# EAGLE board Lynx-32 (EAGLE 9.6.2)
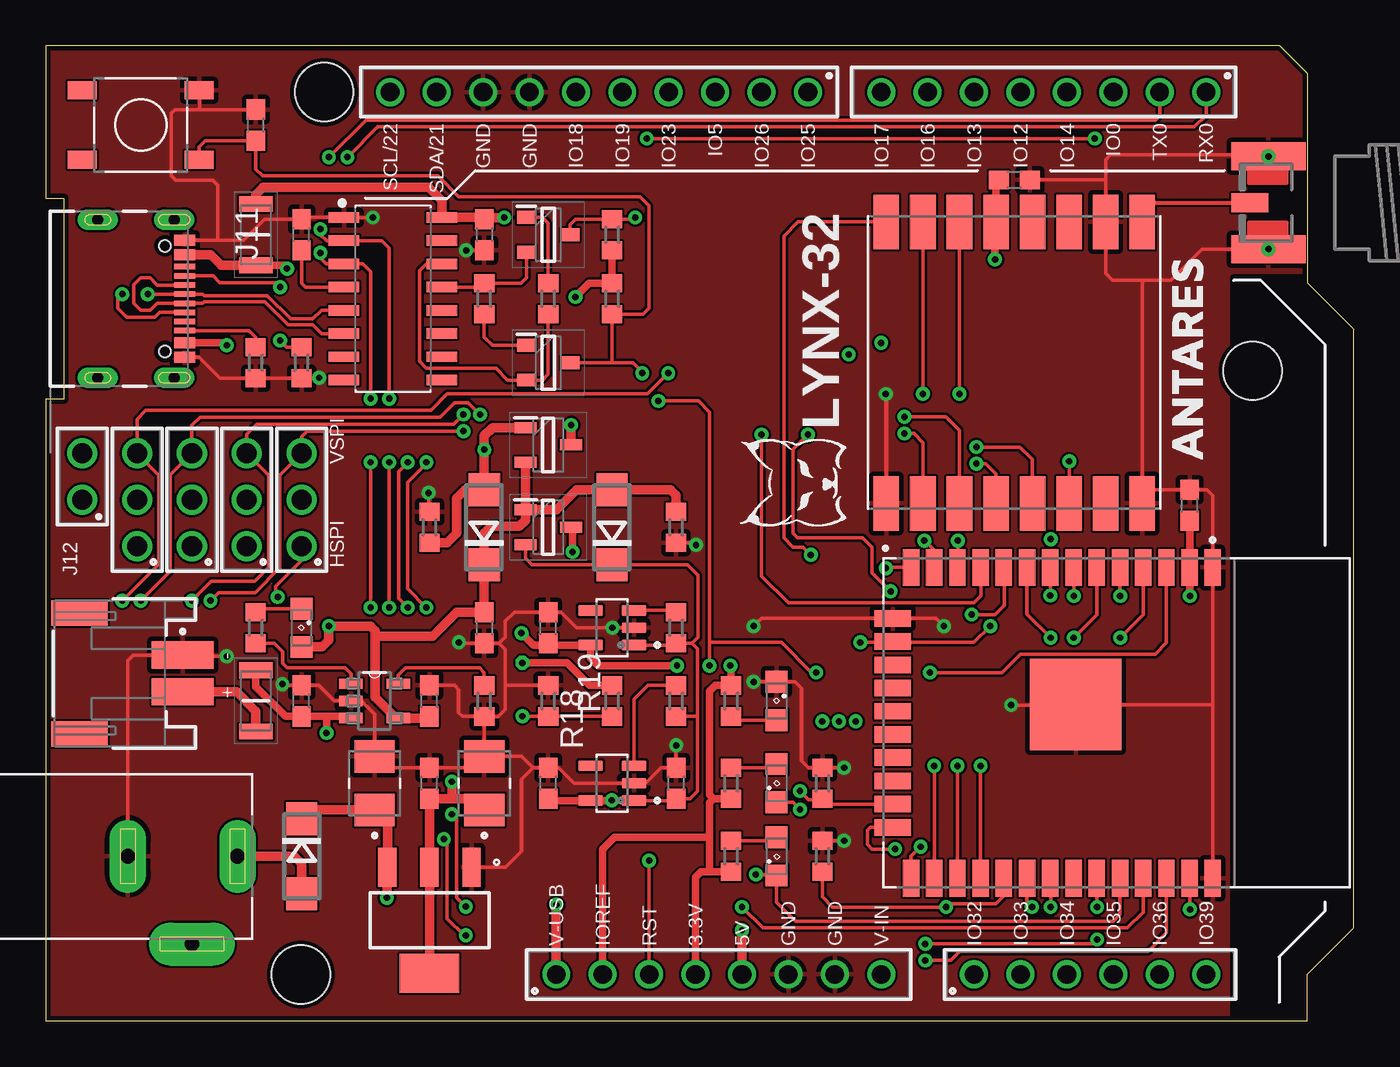
[diagram p0: board, top side]
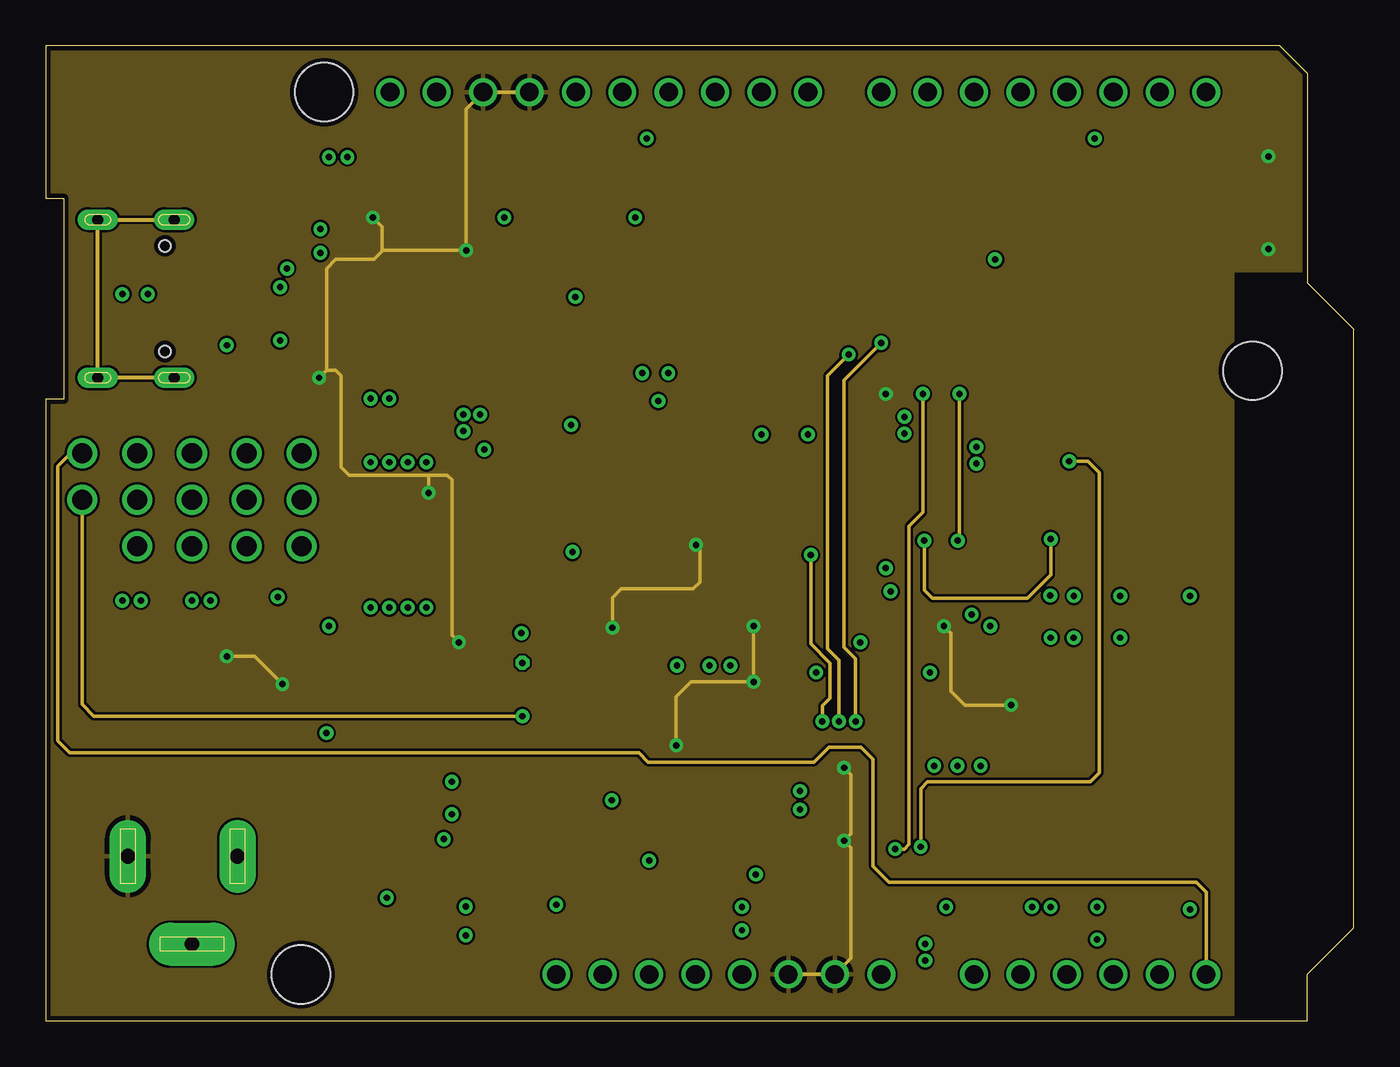
[diagram p1: board, inner layer Route2]
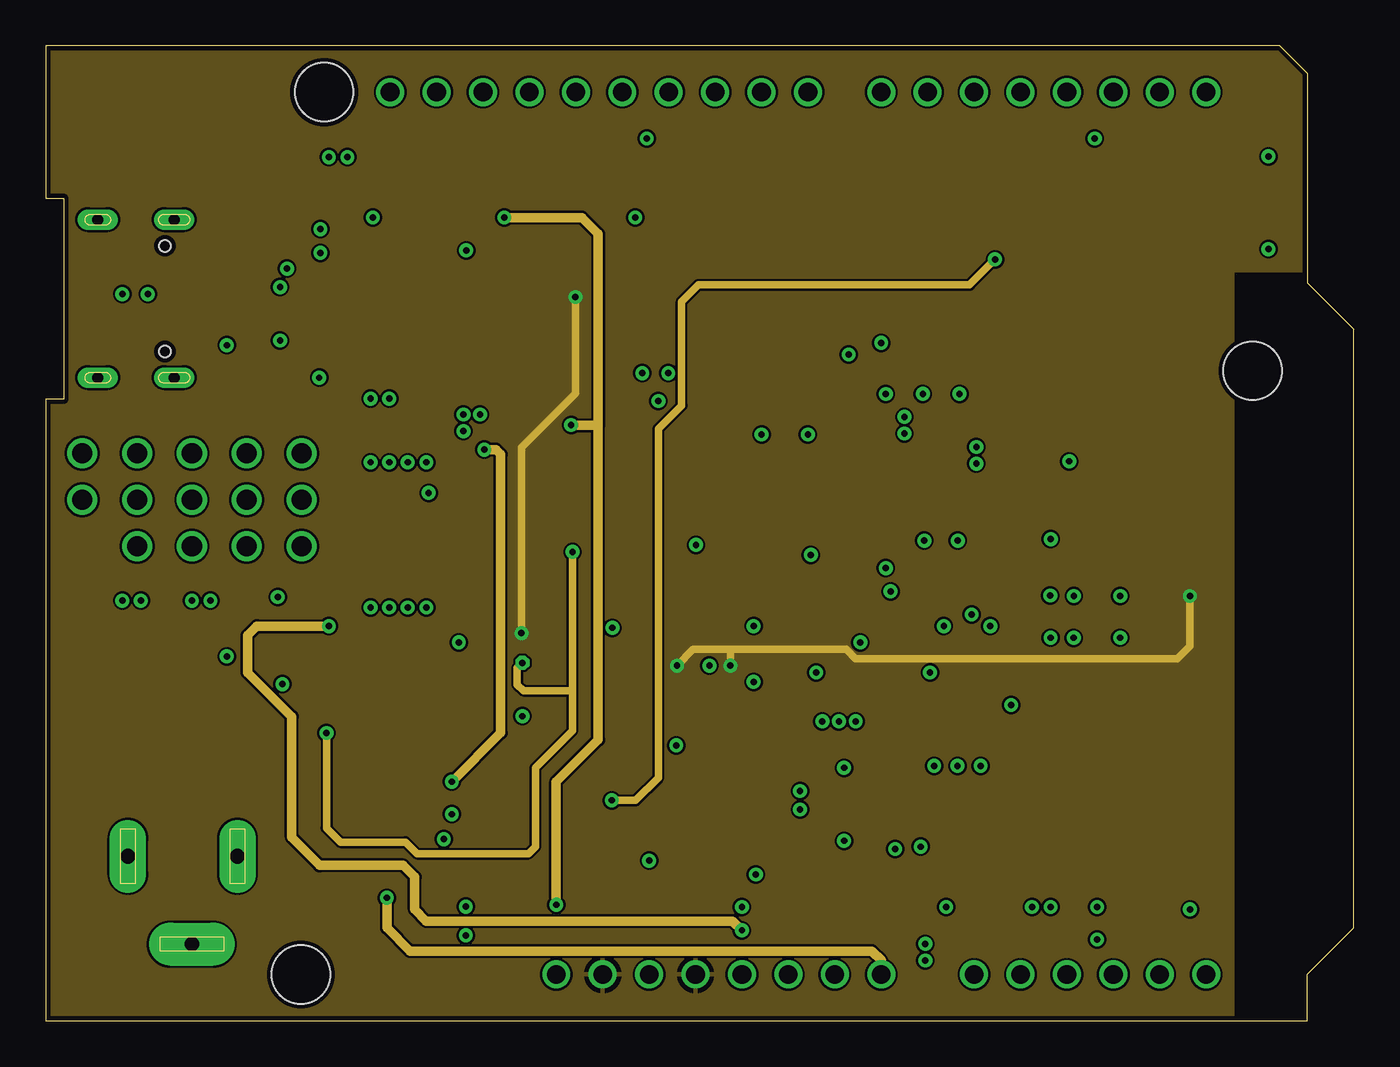
[diagram p2: board, inner layer Route15]
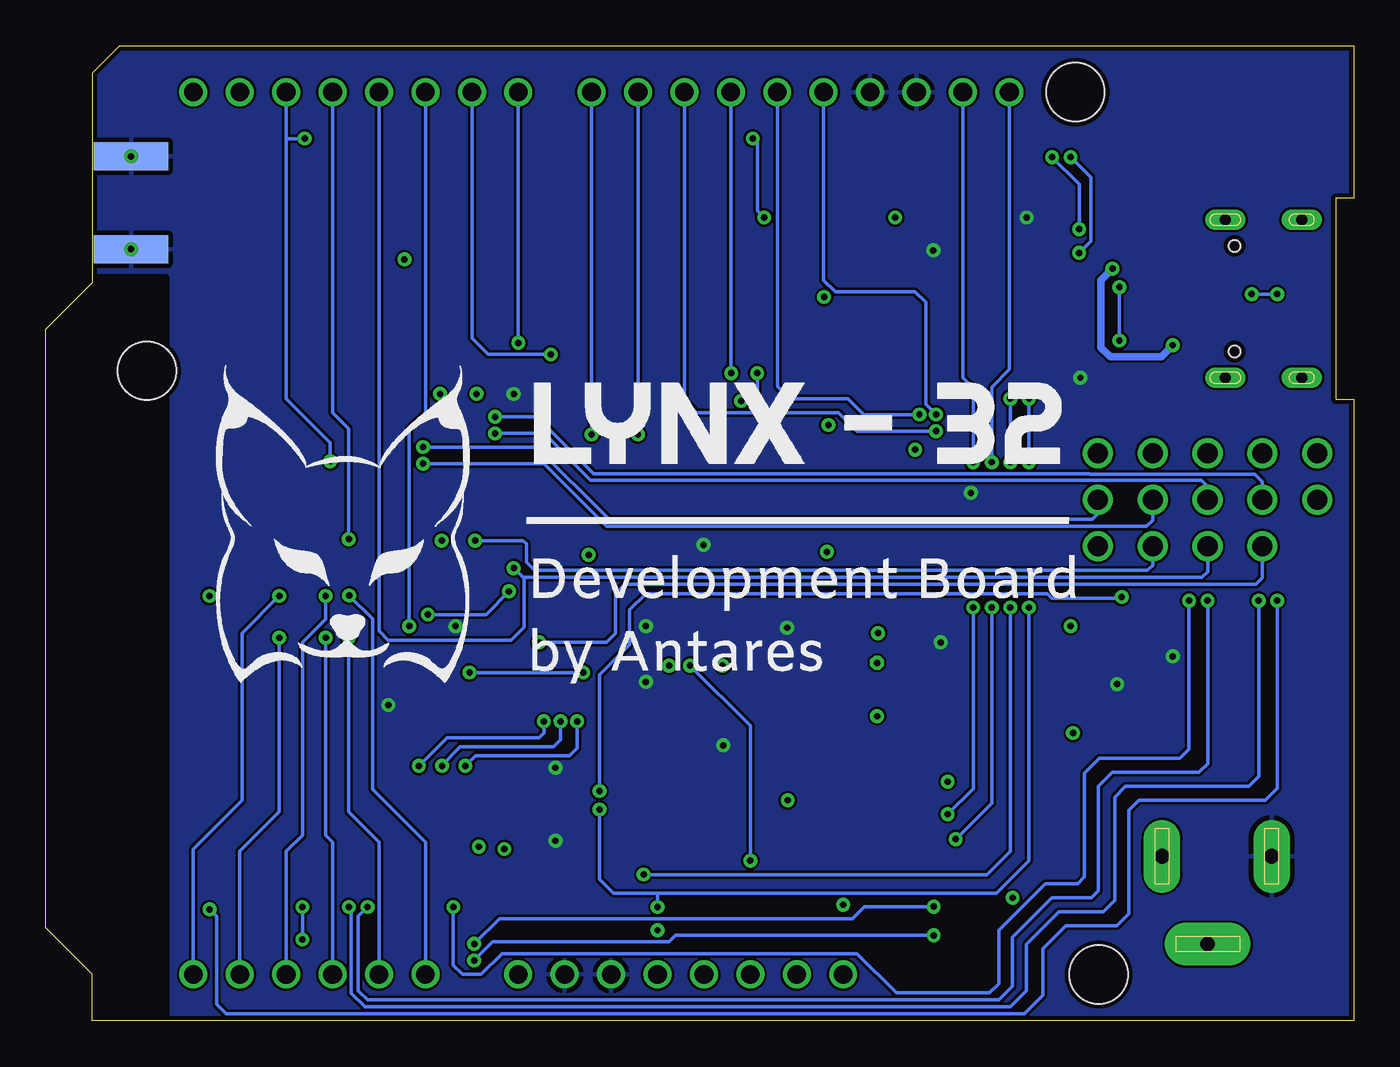
[diagram p3: board, bottom side, seen from below]

Size 71.58 x 53.34 mm. Coordinates in mm from the lower left corner, seen from the top.
Outline: 0,0 69.04,0 69.04,2.54 71.58,5.08 71.58,37.84 69.04,40.38 69.04,51.82 67.52,53.34 0,53.34 0,45 1,45 1,34 0,34 0,0
Copper layers (1+2*15+16): Top 0.035mm / dielectric 0.2mm / Route2 0.0175mm / dielectric 0.665mm / Route15 0.0175mm / dielectric 0.2mm / Bottom 0.035mm
Design rules "default *": minimum track width 5mil, minimum drill 0.25mm, track to track 5mil, track to pad 6mil, pad to pad 6mil, via to via 6mil, smd to smd 6mil, copper to edge 10mil, drill to drill 6mil, minimum pad ring 10mil, minimum via ring 8mil, stop-mask expansion 4mil, vias tented up to drill 25mil, thermal gap 10mil
Holes 3.2 mm at 13.97,2.54 15.24,50.8 66.04,35.56
tRestrict: 5 lines
bRestrict: 4 lines
vRestrict: 3 lines

## Footprints (pad centres in the part's own frame; a part is rotated, then mirrored left to right if it is on the bottom)
C0603 = smd 1.1 x 1: 1 -0.85,0; 2 0.85,0
CAPPM3528X210N = smd 1.79 x 2.21: 1 -1.46,0; 2 1.46,0
DO214AC = smd 1.8 x 1.7: A 2.05,0; C -2.05,0
FUSC3216X100N = smd 0.86 x 1.82: 1 -1.675,0; 2 1.675,0
61300611821 = drill 1.02: 1 -6.35,0; 2 -3.81,0; 3 -1.27,0; 4 1.27,0; 5 3.81,0; 6 6.35,0
61300811821 = drill 1.02: 1 -8.89,0; 2 -6.35,0; 3 -3.81,0; 4 -1.27,0; 5 1.27,0; 6 3.81,0; 7 6.35,0; 8 8.89,0
61301011821 = drill 1.02: 1 -11.43,0; 2 -8.89,0; 3 -6.35,0; 4 -3.81,0; 5 -1.27,0; 6 1.27,0; 7 3.81,0; 8 6.35,0; 9 8.89,0; 10 11.43,0
NINIGI_DC-005 = drill 0.8 pad 2.35 long: 2 0,-4.8 | drill 0.8 pad 2 long: 3 -3.5,0; 4 2.5,0
61300311121 = drill 1.1: 1 -2.54,0; 2 0,0; 3 2.54,0
620102131822 = smd 1.5 x 3.4: 1 -1,2.9; 2 1,2.9 | smd 1.4 x 3.1: Z1 -3.3,-2.75; Z2 3.3,-2.75
GCT_USB4105-GF-A = smd 0.6 x 1.15: A1_B12 -3.2,4.755; A4_B9 -2.4,4.755; B1_A12 3.2,4.755; B4_A9 2.4,4.755 | smd 0.3 x 1.15: A5 -1.25,4.755; A6 -0.25,4.755; A7 0.25,4.755; A8 1.25,4.755; B5 1.75,4.755; B6 0.75,4.755; B7 -0.75,4.755; B8 -1.75,4.755 | drill 0.6 pad 1.05 long: S1 -4.32,4.18; S4 4.32,4.18 | drill 0.6 pad 1 long: S2 -4.32,0; S3 4.32,0 | hole 0.65: 2.89,3.68; -2.89,3.68
61300211121 = drill 1.1: 1 -1.27,0; 2 1.27,0
SML0805 = smd 1.2 x 1.2: A 1.05,0; C -1.05,0
SOT95P280X125-3N = smd 1.2 x 0.6: 1 -1.25,0.95; 2 -1.25,-0.95; 3 1.25,0
SOT95P240X120-3N = smd 1 x 0.7: 1 -1.2,0.95; 2 -1.2,-0.95; 3 1.2,0
R0603 = smd 1 x 1.1: 1 -0.85,0; 2 0.85,0
SW_PTS525SM15SMTR2LFS = smd 1.6 x 1: 1 -3.2,1.9; 2 3.2,1.9; 3 -3.2,-1.9; 4 3.2,-1.9
MODULE_ESP32-WROOM-32(8MB) = smd 2 x 0.9: 1 -8.5,5.26; 2 -8.5,3.99; 3 -8.5,2.72; 4 -8.5,1.45; 5 -8.5,0.18; 6 -8.5,-1.09; 7 -8.5,-2.36; 8 -8.5,-3.63; 9 -8.5,-4.9; 10 -8.5,-6.17; 11 -8.5,-7.44; 12 -8.5,-8.71; 13 -8.5,-9.98; 14 -8.5,-11.25; 25 8.5,-11.25; 26 8.5,-9.98; 27 8.5,-8.71; 28 8.5,-7.44; 29 8.5,-6.17; 30 8.5,-4.9; 31 8.5,-3.63; 32 8.5,-2.36; 33 8.5,-1.09; 34 8.5,0.18; 35 8.5,1.45; 36 8.5,2.72; 37 8.5,3.99; 38 8.5,5.26 | smd 0.9 x 2: 15 -5.715,-12.25; 16 -4.445,-12.25; 17 -3.175,-12.25; 18 -1.905,-12.25; 19 -0.635,-12.25; 20 0.635,-12.25; 21 1.905,-12.25; 22 3.175,-12.25; 23 4.445,-12.25; 24 5.715,-12.25 | smd 5 x 5: 39 -1,-2.24
XCVR_RFM95W-915S2 = smd 3 x 1.4: 1 -7.7,7; 2 -7.7,5; 3 -7.7,3; 4 -7.7,1; 5 -7.7,-1; 6 -7.7,-3; 7 -7.7,-5; 8 -7.7,-7; 9 7.7,-7; 10 7.7,-5; 11 7.7,-3; 12 7.7,-1; 13 7.7,1; 14 7.7,3; 15 7.7,5; 16 7.7,7
SOT95P285X140-5N = smd 1.35 x 0.6: 1 -1.185,0.95; 2 -1.185,0; 3 -1.185,-0.95; 4 1.185,-0.95; 5 1.185,0.95
SOT230P700X180-4N = smd 2.15 x 1: 1 -2.9,2.3; 2 -2.9,0; 3 -2.9,-2.3 | smd 2.15 x 3.25: 4 2.9,0
SMA = smd 1.524 x 4.064: GND@1 2.54,2.032; GND@2 -2.54,2.032 | smd 1.524 x 4.064 bottom: GND@3 -2.54,2.032; GND@4 2.54,2.032 | smd 1.016 x 2.032: P 0,3.048
SOIC127P600X175-16N = smd 1.655 x 0.568: 1 -2.678,4.445; 2 -2.678,3.175; 3 -2.678,1.905; 4 -2.678,0.635; 5 -2.678,-0.635; 6 -2.678,-1.905; 7 -2.678,-3.175; 8 -2.678,-4.445; 9 2.678,-4.445; 10 2.678,-3.175; 11 2.678,-1.905; 12 2.678,-0.635; 13 2.678,0.635; 14 2.678,1.905; 15 2.678,3.175; 16 2.678,4.445
SOT95P280X145-5N = smd 1.27 x 0.559: 1 -1.295,0.94; 2 -1.295,0; 3 -1.295,-0.94; 4 1.295,-0.94; 5 1.295,0.94

## Placement (x,y rotation side)
C1  100nF  [C0603]  24,43 270 top
C2  100nF  [C0603]  14,43 90 top
C3  100nF  [C0603]  24,21.5 270 top
C4  100nF  [C0603]  27.5,21.5 90 top
C5  100nF  [C0603]  34.5,13 90 top
C6  100nF  [C0603]  27.5,13 90 top
C7  T543B106M025ATS100  [CAPPM3528X210N]  18,13 90 top
C8  T543B106M025ATS100  [CAPPM3528X210N]  24,13 90 top
C9  100nF  [C0603]  21,13 90 top
C10  100nF  [C0603]  14,17.5 90 top
C11  100nF  [C0603]  21,17.5 90 top
C12  100nF  [C0603]  11.5,49 90 top
C14  100nF  [C0603]  62.6,28.2 90 top
C15  100nF  [C0603]  53,46 0 top
D1  [DO214AC]  24,27 90 top
D2  [DO214AC]  31,27 90 top
D3  [DO214AC]  14,9 270 top
F1  MF-NSML260_12-2  [FUSC3216X100N]  11.5,43 270 top
F2  MF-NSML260_12-2  [FUSC3216X100N]  11.5,17.5 270 top
J1  [61300611821]  57.15,2.54 0 top
J2  [61300811821]  36.83,2.54 0 top
J3  [61300811821]  54.61,50.8 180 top
J4  [61301011821]  30.28,50.8 180 top
J5  DC-005  [NINIGI_DC-005]  8,9 0 top
J6  [61300311121]  5,28.5 90 top
J7  [61300311121]  8,28.5 90 top
J8  [61300311121]  11,28.5 90 top
J9  [61300311121]  14,28.5 90 top
J10  620102131822  [620102131822]  4.6,19 270 top
J11  USB4105-GF-A  [GCT_USB4105-GF-A]  2.85,39.5 270 top
J12  [61300211121]  2,29.77 90 top
LED1  [SML0805]  40,13 90 top
LED2  [SML0805]  40,9 90 top
LED3  [SML0805]  40,17.5 270 top
LED4  [SML0805]  14,21.5 270 top
Q1  AO3401A  [SOT95P280X125-3N]  27.5,31.5 0 top
Q2  AO3401A  [SOT95P280X125-3N]  27.5,27 0 top
Q3  MMBT3904  [SOT95P240X120-3N]  27.5,36 0 top
Q4  MMBT3904  [SOT95P240X120-3N]  27.5,43 0 top
R1  5.1K  [R0603]  14,36 90 top
R2  5.1K  [R0603]  11.5,36 90 top
R3  2K  [R0603]  37.5,13 270 top
R4  2K  [R0603]  37.5,9 270 top
R5  1K  [R0603]  24,39.5 270 top
R6  10K  [R0603]  31,39.5 90 top
R7  1K  [R0603]  27.5,39.5 270 top
R8  10K  [R0603]  31,43 90 top
R9  100K  [R0603]  21,27 270 top
R10  100K  [R0603]  34.5,27 90 top
R11  10K  [R0603]  34.5,21.5 90 top
R12  10K  [R0603]  34.5,17.5 90 top
R13  10K  [R0603]  24,17.5 90 top
R14  2K  [R0603]  37.5,17.5 90 top
R15  10K  [R0603]  42.5,13 270 top
R16  470R  [R0603]  11.5,21.5 90 top
R17  10K  [R0603]  42.5,9 270 top
R18  5.1K  [R0603]  27.5,17.5 270 top
R19  5.1K  [R0603]  31,17.5 90 top
S1  PTS525SM15SMTR2LFS  [SW_PTS525SM15SMTR2LFS]  5.2,49 0 top
U1  ESP32-WROOM-32(8MB)  [MODULE_ESP32-WROOM-32(8MB)]  58.6,16.3 270 top
U2  RFM95W-915S2  [XCVR_RFM95W-915S2]  53,36 90 top
U3  AP2112K-3.3TRG1  [SOT95P285X140-5N]  31,21.5 180 top
U4  AP2112K-3.3TRG1  [SOT95P285X140-5N]  31,13 180 top
U5  LD1117S50TR  [SOT230P700X180-4N]  21,5.5 270 top
U$1  SMA  [SMA]  68.94,44.75 90 top
U$2  CH340G-3D  [SOIC127P600X175-16N]  19,39.5 0 top
U$3  MCP73831T-5ACI/OT  [SOT95P280X145-5N]  18,17.5 0 top

## Library data of the parts
C1-C6 C9-C12 C14 C15 = rcl; SPICEPREFIX: C
C7 C8 = T543B106M025ATS100; AVAILABILITY: Not in stock; DESCRIPTION: CAP TANT POLY 10UF 25V 3528; MF: KEMET; MP: T543B106M025ATS100; PACKAGE: 1411 KEMET; PRICE: None
D1-D3 = diode
F1 F2 = MF-NSML260_12-2; ARROW_PART_NUMBER: MF-NSML260/12-2; ARROW_PRICE-STOCK: https://www.arrow.com/en/products/mf-nsml26012-2/bourns; DESCRIPTION: Resettable Fuses - PPTC 2.6A 12V 1206 LOW-OHMIC; HEIGHT: 1mm; MANUFACTURER_NAME: Bourns; MANUFACTURER_PART_NUMBER: MF-NSML260/12-2; MOUSER_PART_NUMBER: 652-MF-NSML260/12-2; MOUSER_PRICE-STOCK: https://www.mouser.com/Search/Refine.aspx?Keyword=652-MF-NSML260%2F12-2
J1 = Wurth_Connectors_WR-PHD; DATASHEET-URL: https://katalog.we-online.com/em/datasheet/61300611821.pdf; GENDER: Socket Header; IR: 3A; MATES: WR-PHD 2.54mm SMT Pin Header/THT Angled Pin Header/THT Pin Header; PACKAGING: Tray; PART-NUMBER: 61300611821; PINS: 6; ROWS: Single; TYPE: Straight
J2 J3 = Wurth_Connectors_WR-PHD; DATASHEET-URL: https://katalog.we-online.com/em/datasheet/61300811821.pdf; GENDER: Socket Header; IR: 3A; MATES: WR-PHD 2.54mm SMT Pin Header/THT Angled Pin Header/THT Pin Header; PACKAGING: Tray; PART-NUMBER: 61300811821; PINS: 8; ROWS: Single; TYPE: Straight
J4 = Wurth_Connectors_WR-PHD; DATASHEET-URL: https://katalog.we-online.com/em/datasheet/61301011821.pdf; GENDER: Socket Header; IR: 3A; MATES: WR-PHD 2.54mm SMT Pin Header/THT Angled Pin Header/THT Pin Header; PACKAGING: Tray; PART-NUMBER: 61301011821; PINS: 10; ROWS: Single; TYPE: Straight
J5 = DC-005; AVAILABILITY: No availability data; DESCRIPTION: 6.4x14.2x9.0mm Power DC Receptacle; MF: Best Inc.; MP: DC-005; PACKAGE: DC Power Jack Best Inc.; PRICE: None
J6-J9 = Wurth_Connectors_WR-PHD; DATASHEET-URL: https://katalog.we-online.com/em/datasheet/61300311121.pdf; GENDER: Pin Header; IR: 3A; MATES: WR-PHD 2.54mm Angled Socket Header /SMT Socket Header/Socket Header; PACKAGING: Bag; PART-NUMBER: 61300311121; PINS: 3; ROWS: Single; TYPE: Straight
J10 = Wurth_Connectors_WR-WTB; CONTACT-RESISTANCE: 20mOhm; DATASHEET-URL: https://www.we-online.com/catalog/datasheet/620102131822.pdf; GENDER: Male; IR: 2A; L: 8mm; MOUNT: SMT; PACKAGING: Tape and Reel; PART-NUMBER: 620102131822; PCB-CABLE-PANEL: PCB; PINS: 2; PITCH: 2mm; TOL-R: max.; TYPE: Horizontal; USE-WITH: WR-WTB 2.00 mm Female Terminal Housing; WORKING-VOLTAGE: 100V(AC)
J11 = USB4105-GF-A; AVAILABILITY: Warning; DESCRIPTION: USB-C (USB TYPE-C) USB 2.0 Receptacle Connector 24 (16+8 Dummy) Position Surface Mount, Right Angle; Through Hole; MF: GCT; MP: USB4105-GF-A; PACKAGE: None; PRICE: None
J12 = Wurth_Connectors_WR-PHD; DATASHEET-URL: https://katalog.we-online.com/em/datasheet/61300211121.pdf; GENDER: Pin Header; IR: 3A; MATES: WR-PHD 2.54mm Angled Socket Header /SMT Socket Header/Socket Header; PACKAGING: Bag; PART-NUMBER: 61300211121; PINS: 2; ROWS: Single; TYPE: Straight
LED1-LED4 = led
Q1 Q2 = AO3401A; ARROW_PART_NUMBER: AO3401A; ARROW_PRICE-STOCK: https://www.arrow.com/en/products/ao3401a/alpha-and-omega-semiconductor; DESCRIPTION: 30V P-Channel MOSFET; HEIGHT: 1.25mm; MANUFACTURER_NAME: Alpha & Omega Semiconductors; MANUFACTURER_PART_NUMBER: AO3401A
Q3 Q4 = MMBT3904; ARROW_PART_NUMBER: MMBT3904; ARROW_PRICE-STOCK: https://www.arrow.com/en/products/mmbt3904/on-semiconductor; DESCRIPTION: Transistor GP BJT NPN 40V 0.2A SOT23 Fairchild MMBT3904 NPN Bipolar Transistor, 0.2 A, 40 V, 3-Pin SOT-23; HEIGHT: 1.2mm; MANUFACTURER_NAME: ON Semiconductor; MANUFACTURER_PART_NUMBER: MMBT3904; MOUSER_PART_NUMBER: 512-MMBT3904; MOUSER_PRICE-STOCK: https://www.mouser.co.uk/ProductDetail/ON-Semiconductor-Fairchild/MMBT3904?qs=UMEuL5FsraCg3xKjS4uBJQ%3D%3D
R1-R19 = rcl; SPICEPREFIX: R
S1 = PTS525SM15SMTR2LFS; AVAILABILITY: In Stock; DESCRIPTION: Tactile Switch SPST-NO Top Actuated Surface Mount; MF: C&K; MP: PTS525SM15SMTR2 LFS; PACKAGE: Tactile Switch CK; PRICE: None; PURCHASE-URL: https://pricing.snapeda.com/search/part/PTS525SM15SMTR2 LFS/?ref=eda
U1 = ESP32-WROOM-32_8MB_; AVAILABILITY: Unavailable; DESCRIPTION: Bluetooth, WiFi 802.11b/g/n, Bluetooth v4.2 +EDR, Class 1, 2 and 3 Transceiver Module 2.4GHz ~ 2.5GHz Surface Mount; MF: Espressif Systems; MP: ESP32-WROOM-32 (8MB); PACKAGE: Module Espressif Systems; PRICE: None
U2 = RFM95W-915S2; AVAILABILITY: Unavailable; DESCRIPTION: General ISM < 1GHz LoRa™ Transceiver Module 915MHz Surface Mount; MF: RF Solutions; MP: RFM95W-915S2; PACKAGE: SMD-16 RF Solutions; PRICE: None
U3 U4 = AP2112K-3.3TRG1; AVAILABILITY: Unavailable; DESCRIPTION: Linear Voltage Regulator IC 1 Output 600mA SOT-25; MF: Diodes Inc.; MP: AP2112K-3.3TRG1; PACKAGE: SOT-753 Diodes Inc.; PRICE: None
U5 = LD1117S50TR; AVAILABILITY: Good; DESCRIPTION: Linear Voltage Regulator IC 1 Output 800mA SOT-223; MF: STMicroelectronics; MP: LD1117S50TR; PACKAGE: SOT-223 STMicroelectronics; PRICE: None; PURCHASE-URL: https://pricing.snapeda.com/search/part/LD1117S50TR/?ref=eda
U$1 = SMA
U$2 = ch340g
U$3 = MCP73831T-5ACI_OT; AVAILABILITY: Good; DESCRIPTION: Charger IC Lithium Ion/Polymer SOT-23-5; MF: Microchip; MP: MCP73831T-5ACI/OT; PACKAGE: SOT-23-5 Microchip; PRICE: None; PURCHASE-URL: https://pricing.snapeda.com/search/part/MCP73831T-5ACI/OT/?ref=eda

## Nets
3.3V: C4.1 C14.1 J2.2 J2.4 R3.2 R4.2 R6.2 R8.1 R14.2 U1.2 U3.5
3.3V_RFM: C6.1 C15.1 U2.13 U4.5
5V: C3.1 C11.1 D1.C D2.A J2.5 LED4.A Q1.2 Q2.1 R10.2 U$3.4
5V_REG: C8.1 C9.1 D1.A Q1.1 R9.2 U5.2 U5.4
5V_USB: C1.1 F1.1 J2.1 Q1.3 U$2.16
ANT: U2.9 U$1.P
BATLV: J12.1 R18.2 R19.1
CP_RXD: J3.2 LED1.C U1.35 U$2.3
CP_TXD: J3.1 LED2.C U1.34 U$2.2
DTR: Q4.2 R5.1 U$2.13
EN: C12.1 J2.3 Q3.3 R6.1 S1.4 U1.3
GND: C1.2 C2.2 C3.2 C4.2 C5.2 C6.2 C7.2 C8.2 C9.2 C10.2 C11.2 C12.2 C14.2 C15.2 J2.6 J2.7 J4.7 J4.8 J5.3 J10.1 J11.A1_B12 J11.B1_A12 LED3.C R1.1 R2.1 R9.1 R10.1 R13.1 R15.1 R17.1 R18.1 S1.2 U1.1 U1.15 U1.38 U1.39 U2.1 U2.8 U2.10 U3.2 U4.2 U5.1 U$1.GND@1 U$1.GND@2 U$1.GND@3 U$1.GND@4 U$2.1 U$3.2
IO0: J3.3 Q4.3 R8.2 U1.25 U2.6
IO2: U1.24 U2.15
IO4: U1.26 U2.16
IO5: J4.3 J9.3 R17.2 U1.29
IO12: J3.5 J7.1 U1.14
IO13: J3.6 J6.1 U1.16
IO14: J3.4 J8.1 U1.13
IO15: J9.1 R15.2 U1.23
IO16: J3.7 U1.27
IO17: J3.8 U1.28
IO18: J4.6 J8.3 U1.30
IO19: J4.5 J7.3 U1.31
IO21: J4.9 U1.33
IO22: J4.10 U1.36
IO23: J4.4 J6.3 U1.37
IO25: J4.1 U1.10
IO26: J4.2 U1.11
IO27: U1.12 U2.14
IO32: J1.1 U1.8
IO33: J1.2 U1.9
IO34: J1.3 U1.6
IO35: J1.4 U1.7
IO36: J1.5 U1.4
IO39: J1.6 J12.2 U1.5
MISO: J7.2 U2.2
MOSI: J6.2 U2.3
N$1: F1.2 J11.A4_B9 J11.B4_A9
N$3: J11.B5 R2.2
N$5: LED3.A R14.1
N$7: F2.2 J10.2
N$9: J11.A5 R1.2
N$14: C5.1 D2.C Q2.2 R11.1 R12.1 U3.1 U4.1
N$15: C2.1 U$2.4
N$16: LED1.A R3.1
N$17: LED2.A R4.1
N$18: R11.2 U3.3
N$19: R12.2 U4.3
N$20: D3.A J5.4
N$21: R13.2 U$3.5
N$23: Q4.1 R7.1
N$24: Q3.1 R5.2
N$25: LED4.C R16.2
N$29: R16.1 U$3.1
NSS: J9.2 U2.5
RTS: Q3.2 R7.2 U$2.14
SCK: J8.2 U2.4
SHELL_GND: J11.S1 J11.S2 J11.S3 J11.S4
USB_N: J11.A7 J11.B7 U$2.6
USB_P: J11.A6 J11.B6 U$2.5
V-IN: C7.1 D3.C J2.8 U5.3
VBAT: C10.1 F2.1 Q2.3 R19.2 U$3.3

## Tracks (layer width: path | path; a pad name or v marks a point on that pad's centre or on a via)
3.3V  (via drill 0.35)
  Top 0.406: R3.2 36.53,12.15 | 36.53,12.15 36.32,11.94 36.32,10.03 | 27.6,20.55 U3.5 29.82,19.84 30.23,19.43 v34.54,19.43 | 27.6,20.55 C4.1 | 36.53,12.15 36.32,12.36 36.32,18.03 36.64,18.35 R14.2 37.5,19.4 v37.47,19.43 | R8.1 R6.2 29.74,40.35 v28.99,39.59 | C14.1 U1.2 | U1.2 | v62.61,23.24 62.6,23.25 U1.2 | v26.04,21.21 26.69,20.55 27.6,20.55 | J2.2 30.48,9.37 31.14,10.03 36.32,10.03 | 36.3,8.15 35.86,8.15 35.56,7.85 J2.4 | 36.3,8.15 R4.2 | 36.32,10.03 36.32,8.18 36.3,8.15
  Route15 0.406: v34.54,19.43 35.43,20.32 37.47,20.32 | v62.61,23.24 62.61,20.5 61.92,19.81 44.32,19.81 43.81,20.32 37.47,20.32 | v28.99,39.59 28.99,34.32 26.04,31.37 v26.04,21.21 | v37.47,19.43 37.47,20.32
  pour Route15: 0,0 65,0 65,10 65,41 69,41 69,54 67,54 0,54
3.3V_RFM  (via drill 0.35)
  Top 0.406: C6.1 27.6,12.05 U4.5 30.96,12.05 v30.98,12.06 | C15.1 52,45.85 U2.13 51.94,43.64 v51.94,41.66
  Route15 0.406: v30.98,12.06 32.28,12.06 33.53,13.31 33.53,32.38 34.8,33.66 34.8,39.34 35.71,40.26 50.55,40.26 v51.94,41.66
5V  (via drill 0.35)
  Top 0.508: Q1.2 Q2.1 | Q2.1 27.95,27.95 29.05,29.05 D2.A 34.2,29.05 34.5,28.75 R10.2 | Q2.1 26.25,27.39 25.91,27.05 24.38,27.05 24,26.67 D1.C C3.1 22.48,22.35 21.16,21.03 18.03,21.03 | C11.1 20.91,16.56 U$3.4 19.18,16.56 18.03,17.7 18.03,21.03 | J2.5 v38.1,4.95 | 18.03,21.03 18.03,21.33 17.78,21.59 v15.49,21.59 15.49,20.83 15.12,20.45 LED4.A
  Route15 0.508: v38.1,4.95 37.59,5.46 20.83,5.46 20.19,6.1 20.19,7.87 19.56,8.51 14.99,8.51 13.46,10.03 13.46,16.64 11.05,19.05 11.05,21.08 11.56,21.59 v15.49,21.59
5V_REG  (via drill 0.35)
  Top 0.508: U5.4 U5.2 C9.1 22.23,12.15 | 22.23,12.15 23.39,12.15 C8.1 | R9.2 21.96,26.15 22.48,26.67 22.48,28.57 22.95,29.05 D1.A v24,31.24 24,32 24.45,32.45 Q1.1 | 22.23,12.15 v22.23,13.08
  Route15 0.508: v22.23,13.08 24.89,15.75 24.89,30.98 24.64,31.24 v24,31.24
5V_USB  (via drill 0.35)
  Top 0.508: F1.1 11.5,45.18 11.91,45.59 20.95,45.59 21.68,44.87 U$2.16 23.91,43.95 23.91,43.94 | 23.91,43.94 C1.1 | Q1.3 v28.75,32.59 | v25.09,43.94 23.91,43.94 | J2.1 v27.94,6.35
  Route15 0.508: v25.09,43.94 29.34,43.94 30.23,43.05 30.23,32.59 | 30.23,32.59 30.23,15.37 27.94,13.08 v27.94,6.35 | 30.23,32.59 30.22,32.59 v28.75,32.59
ANT
  Top 0.213: U2.9 60,44.08 60.67,44.75 U$1.P
BATLV  (via drill 0.35)
  Top 0.203: R19.1 R18.2 v26.1,16.65 v26.09,16.66
  Route2 0.203: v26.09,16.66 2.64,16.66 2,17.3 J12.1
CP_RXD  (via drill 0.35)
  Top 0.203: v17.78,34.03 17.78,40.97 17.34,41.41 U$2.3 15.36,41.41 15.03,41.73 v15.03,42.01 | v17.78,30.55 v17.78,22.61 | v41.27,11.56 40.88,11.95 LED1.C | U1.35 60.05,5.95 59.18,5.08 39.24,5.08 v38.1,6.22 | J3.2 60.96,49.53 60.71,49.28 17.53,49.28 v15.49,47.24
  Bottom 0.203: v17.78,34.03 v17.78,30.55 | v41.27,11.56 41.27,7.75 40.51,6.99 38.1,6.99 | v17.78,22.61 17.78,8.76 19.56,6.99 38.1,6.99 | v38.1,6.22 38.1,6.99 | v15.49,47.24 14.4,46.15 14.4,42.65 v15.03,42.01
CP_TXD  (via drill 0.35)
  Top 0.203: v18.8,34.03 18.8,42.27 18.39,42.67 U$2.2 15.36,42.67 15.03,43.01 v15.03,43.31 | v18.8,30.55 v18.8,22.61 | v38.86,8 39.95,8 LED2.C 40,6.48 41.02,5.46 58.42,5.46 58.78,5.82 U1.34 | J3.1 63.5,49.53 62.87,48.9 18.16,48.9 v16.51,47.24
  Bottom 0.203: v18.8,34.03 v18.8,30.55 | v38.86,8 20.07,8 18.8,9.27 v18.8,22.61 | v15.03,43.31 15.03,45.77 v16.51,47.24
DTR
  Top 0.203: Q4.2 26.3,40.65 26,40.35 R5.1 23.79,40.13 U$2.13
EN  (via drill 0.35)
  Top 0.203: S1.4 8.4,47.82 8.73,48.15 C12.1 11.5,46.59 11.86,46.23 21.46,46.23 22.61,45.09 32.51,45.09 33.02,44.58 33.02,38.99 32.68,38.65 R6.1 31,36.01 31.01,36 | J2.3 v33.02,8.76 | v33.53,33.91 35.71,33.91 36.32,33.3 36.32,20.7 | 36.32,20.7 v36.32,19.43 | v32.64,35.43 32.64,35.51 32.15,36 31.01,36 | U1.3 61.32,20.68 60.71,20.07 53.34,20.07 52.32,19.05 v48.39,19.05 | v42.16,19.05 41.91,19.05 40.26,20.7 36.32,20.7 | Q3.3 31.01,36
  Bottom 0.203: v33.02,8.76 33.02,16.13 v36.32,19.43 | v33.53,33.91 33.07,33.91 32.64,34.34 v32.64,35.43 | v48.39,19.05 v42.16,19.05
GND  (via drill 0.35)
  Top 0.203: J11.B1_A12 8.4,36.3 9.55,35.15 R2.1 R1.1 14.94,35.15 v14.96,35.18 | J11.A1_B12 9.4,42.7 | 9.4,42.7 10.82,42.7 11.97,43.85 C2.2 14.1,43.95 U$2.1 v17.91,43.94 | C12.2 8.41,49.85 | J5.3 4.5,19.7 4.79,20 J10.1 7.56,19.94 v9.91,19.94 | v12.95,18.41 13.02,18.35 C10.2 14.92,18.35 15.77,17.5 U$3.2 17.27,17.5 18,16.77 C7.2 18.61,13.85 C9.2 23.39,13.85 C8.2 | 26.66,13.85 C6.2 28.06,13.85 28.91,13 U4.2 32.81,13 33.66,13.85 C5.2 v34.5,15.07 | C8.2 26.05,14.46 26.66,13.85 | U5.1 25.16,8.4 26.04,9.27 26.04,13.22 26.66,13.85 | R13.1 C8.2 | 9.4,42.7 9.4,45.72 9.14,45.97 7.11,45.97 6.86,46.23 6.86,49.63 7.08,49.85 8.41,49.85 | C1.2 v23.01,42.15 v23.01,42.14 | C11.2 22.37,18.35 22.61,18.11 22.61,16.87 22.82,16.65 R13.1 | v43.69,13.84 43.55,13.85 R15.1 41.74,13.85 41.36,14.23 41.36,18.21 41.01,18.55 LED3.C 38.74,18.55 v38.73,18.54 | R17.1 v43.69,9.85 | R9.1 20.95,27.89 v20.95,28.88 | 24.82,20.65 C3.2 22.66,20.65 v22.61,20.7 | R13.1 24.01,16.64 24.77,16.64 25.15,17.02 25.15,18.34 | 24.82,20.65 25.15,20.32 25.15,18.34 | 24.82,20.65 25.15,20.98 25.15,21.84 25.65,22.35 C4.2 28.2,22.35 29.05,21.5 v31.01,21.5 U3.2 | R10.1 35.47,26.15 v35.59,26.04 | U1.39 56.52,17.3 | 56.52,17.3 63.86,17.3 | 63.86,17.3 U1.38 | 63.86,17.3 U1.1 63.86,28.72 63.53,29.05 C14.2 60.5,29.05 60,28.55 U2.8 60,40.46 59.94,40.51 | v38.73,21.59 39.16,22.02 U1.15 48.72,22.02 v49.15,21.59 | 58,45.97 U2.10 58,40.88 58.37,40.51 59.94,40.51 | 59.94,40.51 61.57,40.51 63.27,42.21 U$1.GND@2 | U$1.GND@4 66.83,47.37 58.27,47.37 58,47.1 58,45.97 | v52.83,17.27 56.49,17.27 56.52,17.3 | S1.2 8.41,50.88 8.41,49.85 | 58,45.97 57.97,46 C15.2
  Top 0.203: R18.1 25.16,18.35 25.15,18.34
  Top 0.213: U2.1 46,34.26 v45.97,34.29
  Route2 0.203: v12.95,18.41 11.43,19.94 v9.91,19.94 | v14.96,35.18 15.37,35.58 | 18.41,42.09 18.41,43.43 v17.91,43.94 | 15.37,35.58 15.37,41.15 15.88,41.66 17.98,41.66 18.41,42.09 | 20.95,29.84 16.61,29.84 16.18,30.28 16.18,35.28 15.88,35.58 15.37,35.58 | J2.6 J2.7 44.07,3.43 44.07,9.47 v43.69,9.85 44.07,10.23 44.07,13.46 v43.69,13.84 | J4.7 J4.8 23.01,49.88 v23.01,42.14 18.47,42.14 18.41,42.09 | v22.61,20.7 22.23,21.08 22.23,29.59 21.97,29.84 20.95,29.84 | v35.59,26.04 35.81,25.81 35.81,24 35.43,23.62 31.5,23.62 31.01,23.14 v31.01,21.5 | v34.5,15.07 34.5,17.74 35.31,18.54 v38.73,18.54 v38.73,21.59 | v49.15,21.59 49.53,21.21 49.53,18.03 50.29,17.27 v52.83,17.27 | v20.95,28.88 20.95,29.84
  other vias: 66.91,42.21 66.91,47.29
  pour Top: 0,0 72,0 72,46 72,54 37,54 0,54
  pour Bottom: 0,0 72,0 72,54 0,54
  pour Route2: 0,0 65,0 65,41 69,41 69,54 68,54 0,54
IO0  (via drill 0.35)
  Top 0.203: Q4.3 28.7,43.56 28.99,43.85 R8.2 32.17,43.85 v32.26,43.94 | v56.01,30.61 U2.6 | v57.4,48.26 57.03,48.26 v32.9,48.26 v32.89,48.26 | U1.25 47.35,9 v47.88,9.53
  Route2 0.203: v47.88,9.53 47.88,12.7 48.26,13.08 57.17,13.08 57.66,13.56 57.66,29.97 57.02,30.61 v56.01,30.61
  Bottom 0.203: J3.3 58.42,48.26 | 58.42,48.26 58.42,34.04 56.01,31.62 v56.01,30.61 | v32.26,43.94 32.64,44.32 32.64,48.01 v32.89,48.26 | v57.4,48.26 v57.41,48.26 58.42,48.26
IO2  (via drill 0.35)
  Top 0.203: U2.15 v48,34.3 | v46.48,9.4 45.21,9.4 44.96,9.65 44.96,10.41 45.13,10.59 U1.24
  Route2 0.203: v48,34.3 48,27.81 47.24,27.05 47.24,9.65 46.99,9.4 v46.48,9.4
IO4  (via drill 0.35)
  Top 0.203: U1.26 v48.62,13.95 | v41.87,25.49 41.45,25.91 40.89,25.91 40.39,26.42 40.39,42.93 41.16,43.7 U2.16
  Route2 0.203: v42.5,16.38 42.5,17.22 42.93,17.65 42.93,19.56 41.87,20.61 v41.87,25.49
  Bottom 0.203: v48.62,13.95 48.07,14.5 42.91,14.5 42.5,14.91 v42.5,16.38
IO5  (via drill 0.35)
  Top 0.203: v22.86,32.26 14.31,32.26 14,31.95 J9.3 12.81,29.85 12.81,24.78 11.45,23.42 9.45,23.42 v9.02,22.99 | R17.2 42.5,6.78 43.05,6.22 v49.28,6.22 49.47,6.41 52.01,6.41 52.43,6.84 U1.29
  Bottom 0.203: v22.86,32.26 27.18,32.26 28.19,33.27 35.97,33.27 36.63,33.94 J4.3 | v9.02,22.99 9.02,14.86 9.53,14.35 13.92,14.35 14.73,13.54 14.73,7.87 15.11,7.49 16.89,7.49 19.43,4.95 19.43,2.03 19.94,1.52 25.02,1.52 27.18,3.68 46.61,3.68 47.75,2.54 48.77,2.54 49.28,3.05 v49.28,6.22
IO12  (via drill 0.35)
  Top 0.203: v45.97,24.77 46.01,24.8 U1.14
  Bottom 0.203: J7.1 8,24.56 8.3,24.26 45.34,24.26 | v45.97,24.77 45.47,24.26 45.34,24.26 | 45.34,24.26 45.4,24.19 45.4,21.53 46.1,20.83 52.83,20.83 53.34,21.34 J3.5
IO13  (via drill 0.35)
  Top 0.203: v44.58,20.7 46.31,20.7 | 46.31,20.7 U1.16 | v51.69,21.59 50.8,20.7 46.31,20.7
  Bottom 0.203: J6.1 5,24.23 5.36,23.88 39.88,23.88 40.39,23.37 40.39,21.21 40.89,20.7 v44.58,20.7 | J3.6 50.8,33.27 51.69,32.38 v51.69,21.59
IO14  (via drill 0.35)
  Top 0.203: U1.13 48.62,25.73 v48.08,26.27
  Route2 0.203: v48.08,26.27 48.08,23.55 48.51,23.11 53.72,23.11 55,24.39 v55,26.35
  Bottom 0.203: J8.1 11,24.93 11.29,24.64 44.83,24.64 45.28,25.08 45.28,26.1 45.45,26.27 v48.08,26.27 | J3.4 55.88,33.27 55,32.39 v55,26.35
IO15  (via drill 0.35)
  Top 0.203: J9.1 14,25.19 12.57,23.76 12.57,23.31 v12.7,23.18 | R15.2 42.55,12.11 | 42.55,12.11 42.8,11.86 U1.23 | v41.27,12.57 41.74,12.11 42.55,12.11
  Bottom 0.203: v41.27,12.57 41.27,18.92 39.62,20.57 39.62,22.48 38.73,23.37 16.76,23.37 16.51,23.11 12.77,23.11 v12.7,23.18
IO16  (via drill 0.35)
  Top 0.203: U1.27 v49.89,13.95
  Route2 0.203: v43.41,16.38 43.41,19.71 42.78,20.34 42.78,35.29 v43.94,36.45
  Bottom 0.203: J3.7 48.26,37.34 47.37,36.45 v43.94,36.45 | v49.89,13.95 49.89,13.99 48.9,14.99 43.79,14.99 43.41,15.37 v43.41,16.38
IO17  (via drill 0.35)
  Top 0.203: U1.28 v51.16,13.95
  Route2 0.203: v44.32,16.38 44.32,19.81 43.69,20.45 43.69,35.05 v45.72,37.08
  Bottom 0.203: J3.8 v45.72,37.08 | v51.16,13.95 49.62,15.49 44.58,15.49 44.32,15.75 v44.32,16.38
IO18  (via drill 0.35)
  Top 0.203: v22.86,33.17 22.33,32.64 11.54,32.64 11,32.09 J8.3 12.2,29.84 12.2,24.82 11.44,24.05 9.06,24.05 v8,22.99 | v53.97,6.22 53.7,6.5 U1.30
  Bottom 0.203: v22.86,33.17 23.42,33.73 23.42,39.3 24,39.88 28.38,39.88 29.01,40.51 J4.6 | v8,22.99 8,14.07 8.48,13.59 13.21,13.59 13.97,12.83 13.97,7.11 14.35,6.73 16.51,6.73 18.67,4.57 18.67,1.91 19.43,1.14 53.98,1.14 54.48,1.65 54.48,5.71 v53.97,6.22
IO19  (via drill 0.35)
  Top 0.203: v23.77,33.17 23.75,33.17 23.12,33.8 22.37,33.8 21.59,33.02 8.45,33.02 8,32.57 J7.3 6.82,29.86 6.82,24.6 v5.21,22.99 | v54.99,6.22 54.99,7.78 U1.31
  Bottom 0.203: v23.77,33.17 26.82,33.17 27.69,34.04 30.86,34.04 31.55,34.73 J4.5 | v5.21,22.99 5.21,13.37 5.75,12.83 12.5,12.83 13.08,12.24 13.08,6.6 13.72,5.97 16.13,5.97 17.91,4.19 17.91,1.65 18.8,0.76 54.1,0.76 54.86,1.52 54.86,6.09 v54.99,6.22
IO21  (via drill 0.35)
  Top 0.203: v20.83,30.55 20.83,30.48 20.13,29.78 19.81,29.46 19.81,23.62 v20.83,22.61 | v22.23,11.3 22.48,11.05 22.48,6.73 22.96,6.25 v22.99,6.25 | v48.13,4.21 57.29,4.21 v57.53,4.45 | v57.53,6.22 57.53,7.78 U1.33
  Bottom 0.203: J4.9 21.39,35.18 20.83,34.62 v20.83,30.55 | v20.83,22.61 20.83,12.7 v22.23,11.3 | v22.99,6.25 26.77,6.25 27.43,5.59 46.76,5.59 v48.13,4.21 | v57.53,4.45 v57.53,6.22
IO22  (via drill 0.35)
  Top 0.203: v19.81,22.61 19.3,23.11 19.3,30.05 v19.81,30.55 | v21.79,9.94 21.97,9.75 21.97,5.59 22.88,4.68 v22.99,4.68 | v48.13,3.3 49.15,3.3 49.53,3.3 50.04,3.81 60.33,3.81 61.32,4.8 U1.36
  Bottom 0.203: J4.10 18.85,35.63 19.81,34.67 v19.81,30.55 | v19.81,22.61 19.81,11.91 v21.79,9.94 | v22.99,4.68 37.11,4.68 37.47,4.32 47.12,4.32 v48.13,3.3
IO23  (via drill 0.35)
  Top 0.203: v34.06,35.43 32.92,34.29 21.97,34.29 21.08,33.4 5.48,33.4 5,32.92 J6.3 6.18,29.86 6.18,24.98 v4.19,22.99 | v62.61,6.1 62.61,7.78 U1.37
  Bottom 0.203: J4.4 34.09,35.46 v34.06,35.43 | v4.19,22.99 4.19,12.72 4.84,12.06 11.76,12.06 12.32,11.51 12.32,5.87 12.98,5.21 15.75,5.21 17.02,3.94 17.02,1.4 18.03,0.38 61.7,0.38 62.23,0.91 62.23,5.71 v62.61,6.1
IO25  (via drill 0.35)
  Top 0.203: v50.67,22.23 51.94,22.23 52.45,22.73 52.45,24.78 U1.10 | v46.23,23.49 v46.23,23.5 45.21,24.51 45.21,25.91 44.7,26.42 41.15,26.42 40.89,26.67 40.89,31.26 v41.71,32.08
  Bottom 0.203: J4.1 v41.71,32.08 | v46.23,23.49 47.49,22.23 v50.67,22.23
IO26  (via drill 0.35)
  Top 0.203: v39.17,32.08 39.17,24.33 40.64,22.86 50.8,22.86 51.18,23.24 51.18,24.78 U1.11
  Bottom 0.203: J4.2 v39.17,32.08
IO27  (via drill 0.35)
  Top 0.203: U2.14 v50,34.3 | v49.91,26.27 49.91,24.82 U1.12
  Route2 0.203: v49.91,26.27 50,26.36 v50,34.3
IO32  (via drill 0.35)
  Top 0.203: U1.8 v54.97,23.26
  Bottom 0.203: v54.97,23.26 53.7,21.99 53.7,12.68 50.8,9.78 J1.1
IO33  (via drill 0.35)
  Top 0.203: v54.99,20.95 53.7,22.25 U1.9
  Bottom 0.203: J1.2 53.34,9.78 54.99,11.43 v54.99,20.95
IO34  (via drill 0.35)
  Top 0.203: v56.26,20.95 57.51,22.2 U1.6
  Bottom 0.203: v56.26,20.95 56.26,20.45 56.26,10.16 55.88,9.78 J1.3
IO35  (via drill 0.35)
  Top 0.203: v56.26,23.24 56.26,24.78 U1.7
  Bottom 0.203: v56.26,23.24 56.26,21.97 57.53,20.7 57.53,10.16 58.42,9.27 J1.4
IO36  (via drill 0.35)
  Top 0.203: v58.8,20.95 60.05,22.2 U1.4
  Bottom 0.203: J1.5 60.96,9.27 58.8,11.43 v58.8,20.95
IO39  (via drill 0.35)
  Top 0.203: v58.8,23.24 58.78,23.26 U1.5
  Route2 0.203: J12.2 1.37,31.04 0.66,30.33 0.66,15.32 1.32,14.66 32.46,14.66 32.97,14.15 42.04,14.15 42.85,14.96 44.6,14.96 45.26,14.3 45.26,8.46 46.15,7.57 62.97,7.57 63.5,7.04 J1.6
  Bottom 0.203: J1.6 63.5,9.4 60.83,12.06 60.83,21.21 v58.8,23.24
MISO  (via drill 0.35)
  Top 0.203: v46.99,32.13 47.5,32.13 48,31.63 U2.2
  Bottom 0.203: J7.2 8,29.22 8.36,29.58 41.77,29.58 44.32,32.13 v46.99,32.13
MOSI  (via drill 0.35)
  Top 0.203: U2.3 50,32.3 49.26,33.04 v46.99,33.04
  Bottom 0.203: J6.2 5,29.5 5.41,29.91 14.45,29.91 14.46,29.92 41.6,29.92 44.72,33.04 v46.99,33.04
N$1  (via drill 0.35)
  Top 0.406: J11.B4_A9 9.76,37.1 v9.91,36.96 | v13.21,41.15 13.03,41.33 F1.2
  Top 0.508: J11.A4_B9 9.03,41.9 9.6,41.33 F1.2
  Bottom 0.406: v9.91,36.96 10.54,36.32 13.34,36.32 13.84,36.83 13.84,40.51 13.21,41.15 v13.21,41.15
N$3
  Top 0.203: R2.2 11.5,37.4 11.14,37.75 J11.B5
N$5
  Top 0.203: LED3.A 37.7,16.45 R14.1
N$7
  Top 0.508: J10.2 10.45,18 11.5,16.95 F2.2
N$9  (via drill 0.35)
  Top 0.203: J11.A5 9.16,40.75 9.53,40.39 12.57,40.39 v12.83,40.13 | v12.83,37.21 13.19,36.85 R1.2
  Bottom 0.203: v12.83,40.13 v12.83,37.21
N$14
  Top 0.203: U3.1 34.4,20.55 R11.1 35.36,20.65 | U4.1 34.4,12.05 C5.1 35.26,12.15 35.66,12.55 35.66,16.66 | 35.66,16.66 35.66,20.35 35.36,20.65 | 35.36,20.65 35.69,20.98 35.69,24.38 35.12,24.95 D2.C 26.61,24.95 26.25,25.31 Q2.2 | 35.66,16.66 35.65,16.65 R12.1
N$15
  Top 0.203: C2.1 14,40.36 14.22,40.13 U$2.4
N$16
  Top 0.203: R3.1 39.8,13.85 LED1.A
N$17
  Top 0.203: R4.1 39.8,9.85 LED2.A
N$18
  Top 0.203: U3.3 34.4,22.45 R11.2
N$19
  Top 0.203: R12.2 32.95,18.35 32.19,17.58 U4.3
N$20
  Top 0.508: J5.4 13.61,9 14,8.61 D3.A
N$21
  Top 0.203: R13.2 24,19.05 23.75,19.3 19.68,19.3 19.3,18.91 U$3.5
N$23
  Top 0.203: Q4.1 27.17,43.95 27.5,43.62 R7.1
N$24
  Top 0.203: R5.2 24,37.39 24.44,36.95 Q3.1
N$25
  Top 0.203: R16.2 11.7,22.55 LED4.C
N$29
  Top 0.203: R16.1 12.5,20.65 12.95,20.19 12.95,19.56 13.21,19.3 16.38,19.3 16.7,18.98 U$3.1
NSS  (via drill 0.35)
  Top 0.203: v50.93,31.39 53.32,31.39 54,30.71 U2.5
  Bottom 0.203: J9.2 14,27.74 14.31,27.43 40.77,27.43 44.72,31.39 v50.93,31.39
RTS
  Top 0.203: R7.2 27.5,35.37 27.18,35.05 Q3.2 25.27,35.05 24.64,35.69 20.83,35.69 20.45,36.07 20.45,41.02 20.83,41.41 U$2.14
SCK  (via drill 0.35)
  Top 0.203: U2.4 52,29.91 51.44,30.48 v50.93,30.48
  Bottom 0.203: J8.2 11,27.39 11.34,27.05 40.89,27.05 44.32,30.48 v50.93,30.48
SHELL_GND
  Route2 0.213: J11.S4 J11.S3 J11.S2 J11.S1
USB_N
  Top 0.203: U$2.6 15.09,37.59 14.62,38.06 13.26,38.06 11.99,39.33 9.47,39.33 9.47,39.34 8.67,39.34 8.59,39.25 J11.A7 7.6,39.24 6.1,39.24 5.71,38.86 5.21,38.86 4.83,39.24 4.83,40.26 5.21,40.64 5.71,40.64 6.11,40.25 J11.B7
USB_P  (via drill 0.35)
  Top 0.203: U$2.5 15.09,38.87 14.62,38.4 13.4,38.4 12.13,39.66 9.72,39.66 | 9.72,39.66 | 9.72,39.66 8.67,39.66 8.59,39.75 J11.A6 v5.59,39.75 | v4.19,39.75 3.94,39.5 3.94,38.99 4.45,38.48 5.97,38.48 6.24,38.75 J11.B6
  Bottom 0.203: v5.59,39.75 v4.19,39.75
V-IN  (via drill 0.35)
  Top 0.508: D3.C 14.49,11.54 16.13,11.54 C7.1 18.7,10.84 U5.3 18.67,8.37 v18.67,6.73
  Route15 0.508: J2.8 45.72,3.3 45.21,3.81 19.94,3.81 18.67,5.08 v18.67,6.73
VBAT  (via drill 0.35)
  Top 0.406: F2.1 11.5,18.27 13.12,16.65 C10.1 15.32,16.65 | 15.32,16.65 16.61,16.65 U$3.3 | 15.32,16.65 15.37,16.6 v15.37,15.75 | v28.83,25.65 28.83,26.92 Q2.3 | R19.2 29.76,18.35 28.52,19.58 v26.09,19.58
  Route15 0.406: v15.37,15.75 15.37,10.54 16.13,9.78 19.68,9.78 20.32,9.14 26.42,9.14 26.8,9.53 26.8,13.84 28.83,15.88 28.83,18.06 | 28.83,18.06 v28.83,25.65 | v26.09,19.58 25.81,19.3 25.81,18.39 26.14,18.06 28.83,18.06

## Text on the board
tPlace: SCL/22 | SDA/21 | GND | GND | IO18 | IO19 | IO23 | IO5 | IO26 | IO25 | IO17 | IO16 | IO13 | IO12 | IO14 | IO0 | TX0 | RX0 | VSPI | LYNX-32 | HSPI | - | + | V-USB | IOREF | RST | 3.3V | 5V | GND | GND | V-IN | IO32 | IO33 | IO34 | IO35 | IO36 | IO39